# Altium PCB Arduino_DUE_V02b.PcbDoc (part 3 of 3)
Units mm, origin at the board's own origin, x right, y up, seen from the top; angles counter-clockwise.
Board outline 112.18 x 53.64 mm, 4 copper layers (Top Layer, Mid-Layer 1, Mid-Layer 2, Bottom Layer); 129 components, 175 nets, 644 pads, 366 vias.
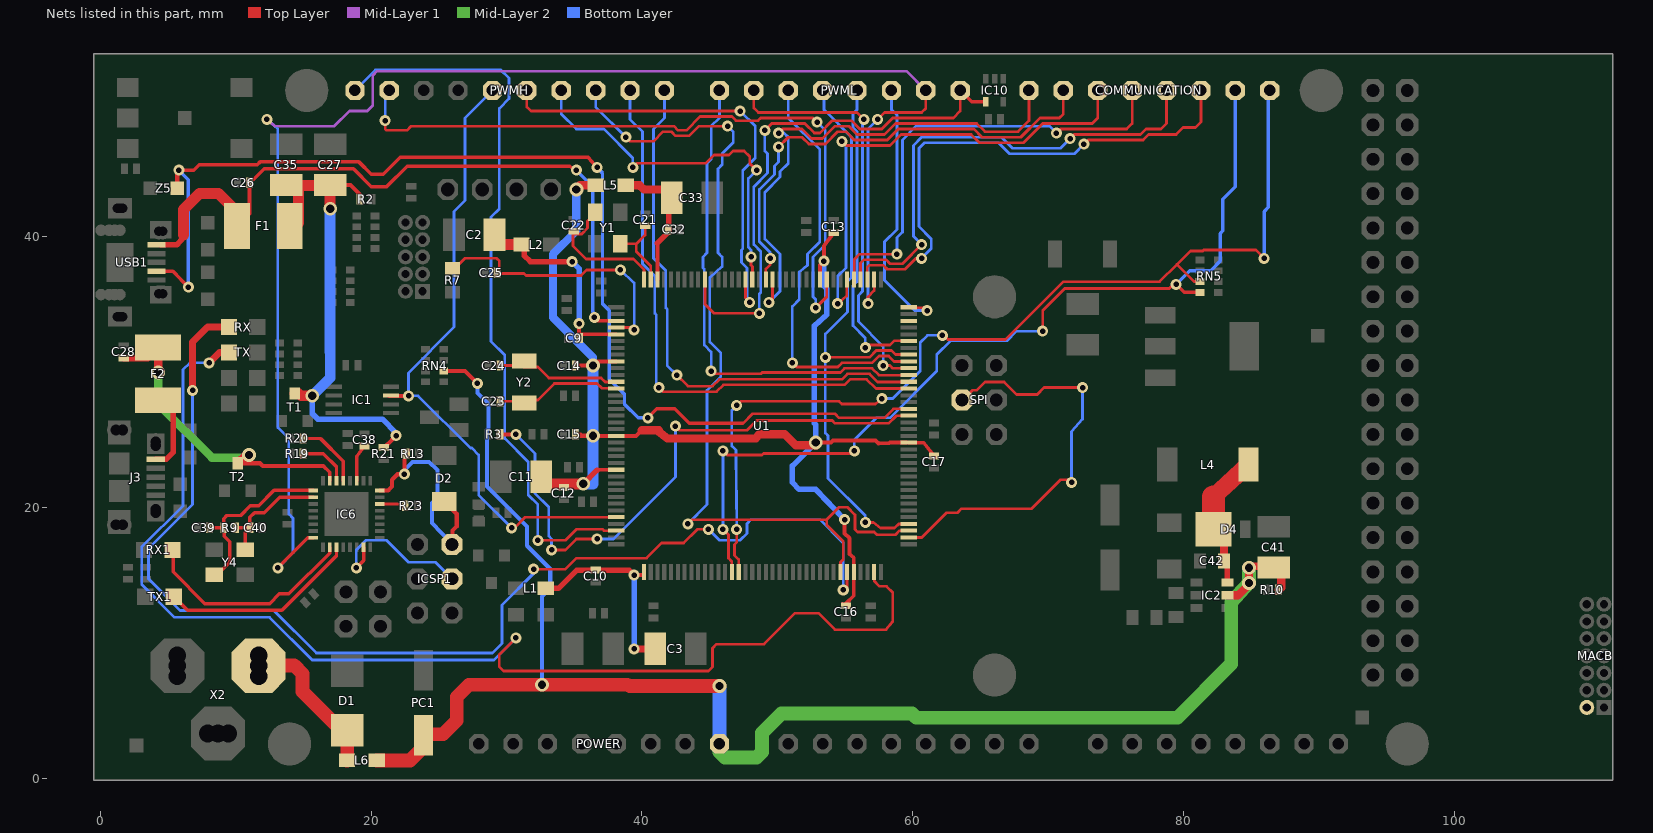
[diagram p5: the nets of this part, all layers, seen from the top]

## Via types
v1: diameter 0.813, hole 0.406, Top Layer to Bottom Layer, 313 vias
v2: diameter 1.016, hole 0.61, Top Layer to Bottom Layer, 52 vias
v3: diameter 0.914, hole 0.508, Top Layer to Bottom Layer, 1 vias

## Nets (pads, with @x,y where several pads share a name; then routed paths per layer and width w, separated by ;. In a path a pad name is that pad's centre, name@x,y a point inside that pad or via, vN(x,y) a via of type N, cw(c..) or ccw(c..) an arc to the next point about the centre after c; other vN are vias at no path point) (continued)
PWM2: PWML.3 U1.144 | length 20.5
  Top Layer w0.203: U1.144@59.695,34.785 59.538,34.747 60.858,34.747 v1(61.062,34.544)
  Bottom Layer w0.203: PWML.3@58.42,50.902 PWML.3@58.42,50.8 58.42,49.378 58.826,48.971 58.826,40.538 57.912,39.624 57.912,36.779 60.147,34.544 v1(61.062,34.544)
PWM3: PWML.4 U1.139 | length 23.2
  Top Layer w0.203: v1(56.49,31.801) 56.693,32.004 58.318,32.004 58.623,32.309 59.538,32.309 U1.139@59.695,32.285
  Bottom Layer w0.203: PWML.4@55.88,50.8 55.88,49.378 55.575,49.073 55.575,48.057 55.88,47.752 55.88,36.678 55.575,36.373 55.575,33.426 56.49,32.512 v1(56.49,31.801)
PWM5: PWML.6 U1.136 | length 31.2
  Top Layer w0.203: v1(51.105,30.683) 51.41,30.378 54.458,30.378 54.762,30.683 56.998,30.683 57.506,31.191 58.217,31.191 58.623,30.785 U1.136@59.695,30.785
  Bottom Layer w0.203: PWML.6@50.8,50.8 50.8,48.768 53.137,46.431 53.137,39.624 52.222,38.71 52.222,37.897 51.613,37.389 51.613,35.357 51.105,34.849 v1(51.105,30.683)
PWM6: PWML.7 U1.135 | length 30.9
  Top Layer w0.203: PWML.7@48.26,50.8 48.26,49.505 48.59,49.174 55.88,49.174 v1(56.388,48.666) ; v1(57.81,30.48) 58.318,30.48 58.522,30.277 59.538,30.277 U1.135@59.695,30.285
  Bottom Layer w0.203: v1(56.388,48.666) 56.286,48.565 56.286,35.966 55.982,35.662 55.982,33.731 57.81,31.902 v1(57.81,30.48)
PWM7: PWML.8 U1.134 | length 36.5
  Top Layer w0.203: v1(45.11,30.074) 45.314,29.87 48.768,29.87 48.87,29.972 54.661,29.972 54.966,30.277 56.998,30.277 57.506,29.769 59.639,29.769 59.655,29.785 U1.134@59.695,29.785
  Bottom Layer w0.203: v1(45.11,30.074) 45.11,31.496 44.602,32.004 44.602,37.592 44.501,37.694 44.501,38.506 44.806,38.811 44.806,45.415 45.11,45.72 45.11,48.158 45.72,48.768 PWML.8@45.72,50.8
PWM8: PWMH.1 U1.133 | length 40.2
  Top Layer w0.203: v1(42.57,29.769) 43.383,28.956 45.212,28.956 45.72,29.464 54.762,29.464 55.169,29.87 56.794,29.87 57.404,29.261 59.538,29.261 U1.133@59.695,29.285
  Bottom Layer w0.203: PWMH.1@41.656,50.8 41.656,48.768 40.843,47.955 40.843,38.405 41.758,37.49 41.758,34.747 41.859,34.646 41.859,30.48 v1(42.57,29.769)
PWM9: PWMH.2 U1.132 | length 42.1
  Top Layer w0.203: v1(41.25,28.854) 41.554,28.55 45.517,28.55 46.025,29.058 54.966,29.058 55.372,29.464 56.591,29.464 57.277,28.778 59.334,28.778 59.429,28.785 U1.132@59.695,28.785
  Bottom Layer w0.203: PWMH.2@39.116,50.8 39.116,48.666 40.03,47.752 40.03,37.998 40.945,37.084 40.945,34.341 41.046,34.239 41.046,29.058 v1(41.25,28.854)
PWM11: PWMH.4 U1.20 | length 28.1
  Top Layer w0.203: v1(39.319,45.11) 39.624,45.415 44.704,45.415 45.314,46.025 46.431,46.025 46.736,46.33 47.549,46.33 47.955,45.923 47.955,45.415 v1(48.463,44.907) ; v1(48.057,38.506) 48.057,37.897 48.158,37.795 48.158,36.982 U1.20@48.145,36.835
  Bottom Layer w0.203: PWMH.4@34.036,50.8 34.036,49.073 35.154,47.955 37.186,47.955 39.319,45.822 v1(39.319,45.11) ; v1(48.057,38.506) 48.057,39.014 47.854,39.218 47.854,44.298 v1(48.463,44.907)
PWM12: PWMH.5 U1.21 | length 34.2
  Top Layer w0.203: PWMH.5@31.496,50.8 31.496,49.581 31.801,49.276 v1(47.244,49.276) ; U1.21@47.645,36.835 47.645,35.464 v1(47.955,35.154)
  Bottom Layer w0.203: v1(47.244,49.276) 48.362,48.158 48.362,45.822 47.447,44.907 47.447,39.116 47.346,39.014 47.346,38.1 47.752,37.694 47.752,35.357 v1(47.955,35.154)
PWM13: IC1.3 PWMH.6 U1.68 | length 48.1
  Top Layer w0.203: IC1.3@21.336,28.245 IC1.3@21.468,28.264 ; v1(30.378,18.491) 30.582,18.491 31.375,19.285 U1.68@38.095,19.285
  Top Layer w0.305: IC1.3@21.336,28.245 v1(22.758,28.245)
  Bottom Layer w0.203: PWMH.6@28.956,50.8 26.924,48.768 26.924,42.672 26.111,41.859 26.111,33.325 22.758,29.921 v1(22.758,28.245) 23.47,28.245 27.33,24.384 27.432,24.384 27.94,23.876 27.94,20.93 v1(30.378,18.491)
RD+: IC6.29 R20.1 | length 5.1
  Top Layer w0.254: R20.1@14.973,25.095 16.256,25.095 17.936,23.415 IC6.29@17.936,21.957
RD-: IC6.30 R19.1 | length 4
  Top Layer w0.254: R19.1@14.973,23.978 14.976,24.018 15.037,23.978 16.459,23.978 17.436,23 IC6.30@17.436,21.957
RESET2: D2.A IC6.24 ICSP1.5 R13.1 | length 17.5
  Top Layer w0.305: IC6.24@20.636,21.257 21.257,21.257 21.539,21.539 21.539,22.047 21.946,22.454 v1(22.454,22.454) 22.454,23.937 R13.1@22.619,23.978 ; D2.A@25.4,20.449 26.314,19.534 26.314,18.593 26.01,18.288 26.01,17.272 ICSP1.5@25.959,17.272
  Bottom Layer w0.305: v1(22.454,22.454) 22.454,22.758 23.063,23.368 24.282,23.368 24.892,22.758 24.892,20.726 24.486,20.32 24.486,18.847 25.908,17.374 25.959,17.323 ICSP1.5@25.959,17.272
RESET_CMD: IC6.22 R23.1 | length 1.9
  Top Layer w0.254: IC6.22@20.636,20.257 21.968,20.257 R23.1@22.517,20.117
RESETA: MACB.2
RX: IC10.4 PWML.1 U1.27 | length 40.3
  Top Layer w0.203: U1.27@44.645,36.835 44.645,35.009 45.314,34.341 v1(48.666,34.341) ; v1(49.073,47.854) 49.581,48.362 52.019,48.362 52.73,47.65 53.137,47.65 54.051,48.565 55.474,48.565 56.083,47.955 57.709,47.955 58.522,48.768 62.992,48.768 63.5,49.276 PWML.1@63.5,50.8
  Top Layer w0.254: PWML.1@63.5,50.8 64.35,49.95 IC10.4@65.39,49.95
  Bottom Layer w0.203: v1(48.666,34.341) 48.666,35.763 48.768,35.865 48.768,38.913 48.26,39.421 48.26,43.688 49.276,44.704 49.276,46.126 49.073,46.33 v1(49.073,47.854)
RXD0: COMMUNICATION.2 U1.18 | length 36.1
  Top Layer w0.203: U1.18@49.145,36.835 49.149,37.617 49.479,37.948 v1(49.479,38.405) ; v1(50.089,46.634) 50.8,47.346 51.816,47.346 52.324,46.838 53.543,46.838 54.458,47.752 55.067,47.752 55.677,47.142 58.115,47.142 58.928,47.955 64.516,47.955 65.126,47.346 67.97,47.346 69.393,48.768 70.815,48.768 71.12,49.073 COMMUNICATION.2@71.12,50.8
  Bottom Layer w0.203: v1(49.479,38.405) 49.479,38.811 48.666,39.624 48.666,43.485 49.784,44.602 49.784,45.212 50.089,45.517 v1(50.089,46.634)
RXD1: COMMUNICATION.4 U1.5 | length 33.7
  Top Layer w0.203: U1.5@55.645,36.835 55.677,36.982 55.677,38.321 56.066,38.71 v1(58.826,38.71) ; v1(70.612,47.65) 70.917,47.955 75.794,47.955 76.2,48.362 COMMUNICATION.4@76.2,50.8
  Bottom Layer w0.203: v1(58.826,38.71) 58.826,39.929 59.233,40.335 59.233,47.142 60.249,48.158 70.104,48.158 v1(70.612,47.65)
RXD2: COMMUNICATION.6 U1.3 | length 38.9
  Top Layer w0.203: U1.3@56.645,36.835 56.645,37.747 56.794,37.897 57.81,37.897 58.115,37.592 59.436,37.592 60.249,38.405 v1(60.655,38.405) ; v1(72.644,46.838) 72.949,47.142 77.013,47.142 77.419,47.549 79.451,47.549 79.959,48.057 80.874,48.057 81.28,48.463 COMMUNICATION.6@81.28,50.8
  Bottom Layer w0.203: v1(60.655,38.405) 61.366,39.116 61.366,39.827 60.452,40.742 60.452,46.533 60.858,46.939 66.345,46.939 67.158,46.126 71.933,46.126 v1(72.644,46.838)
RXL: RX.C U1.103 | length 88.2
  Top Layer w0.203: v1(32.004,15.443) 34.341,15.443 35.154,16.256 40.335,16.256 41.453,17.374 43.078,17.374 44.094,18.39 v1(44.907,18.39) ; v1(54.864,13.919) 55.145,14.099 U1.103@55.145,15.235 U1.103@55.169,15.235
  Top Layer w0.508: v1(6.807,28.651) 6.807,32.207 7.925,33.325 RX.C@9.491,33.325
  Bottom Layer w0.203: v1(6.807,28.651) 6.807,20.218 3.556,16.967 3.556,14.732 5.893,12.395 12.802,12.395 15.951,9.246 28.956,9.246 29.667,9.957 29.667,12.802 32.004,15.138 v1(32.004,15.443) ; v1(44.907,18.39) 45.72,17.577 47.244,17.577 47.752,18.085 47.752,18.796 48.057,19.101 53.137,19.101 54.864,17.374 v1(54.864,13.919)
RXL-U2: IC6.10 RX1.C | length 16.1
  Top Layer w0.254: RX1.C@5.317,16.866 5.385,16.493 5.385,15.24 7.722,12.903 12.497,12.903 13.208,13.614 13.919,13.614 16.936,16.632 IC6.10@16.936,17.057
SCK2: IC6.15 ICSP1.3 | length 11.6
  Top Layer w0.254: v1(18.898,15.545) 19.436,16.084 IC6.15@19.436,17.057
  Bottom Layer w0.203: v1(18.898,15.545) 18.898,16.866 19.609,17.577 21.133,17.577 22.758,15.951 24.74,15.951 ICSP1.3@25.959,14.732
SCL0-3: COMMUNICATION.8 RN5.7 U1.87 | length 73.2
  Top Layer w0.203: v1(46.99,18.39) 46.99,17.424 46.838,17.272 46.838,16.459 47.142,16.154 47.142,15.24 U1.87@47.145,15.235 ; v1(46.99,27.534) 47.295,27.838 54.559,27.838 54.762,27.635 57.252,27.635 v1(57.709,28.042) ; v1(62.179,32.715) 62.281,32.715 62.586,32.41 66.853,32.41 71.12,36.678 78.232,36.678 79.502,37.948 ; RN5.7@81.215,36.684 80.766,36.684 79.502,37.948 ; v1(85.954,38.405) 85.344,39.014 81.483,39.014 81.418,38.949 80.504,38.949 79.502,37.948
  Bottom Layer w0.203: v1(46.99,18.39) 46.939,24.232 46.634,24.536 46.634,27.178 v1(46.99,27.534) ; v1(57.709,28.042) 58.522,28.042 60.554,30.074 60.554,32.182 61.087,32.715 v1(62.179,32.715)
  Bottom Layer w0.254: v1(85.954,38.405) 85.954,41.859 86.258,42.164 86.258,50.698 COMMUNICATION.8@86.36,50.8
SCL1: PWMH.10 U1.70 | length 54.6
  Top Layer w0.203: v1(32.309,17.577) 34.341,17.577 35.154,18.39 37.084,18.39 37.186,18.288 38.092,18.288 U1.70@38.095,18.285 U1.70@37.998,18.288
  Bottom Layer w0.203: PWMH.10@18.796,50.8 20.32,52.324 29.566,52.324 30.175,51.714 30.175,50.19 29.464,49.479 29.464,42.062 28.854,41.453 28.854,32.258 29.87,31.242 29.87,25.095 31.598,23.368 31.598,20.93 32.309,20.218 v1(32.309,17.577)
SDA0-3: COMMUNICATION.7 RN5.8 U1.86 | length 69.3
  Top Layer w0.203: v1(45.974,18.39) 46.38,17.983 46.38,16.256 46.629,16.007 U1.86@46.629,15.337 ; v1(45.974,24.181) 46.279,23.876 48.87,23.876 48.971,23.978 55.474,23.978 v1(55.677,24.181) ; U1.86@46.645,15.235 U1.86@46.629,15.337 ; U1.86@46.685,15.24 U1.86@46.629,15.337 ; v1(69.596,33.02) 69.596,34.544 71.222,36.17 78.943,36.17 79.248,36.474 v1(79.451,36.474)
  Top Layer w0.254: v1(79.451,36.474) 80.041,35.884 RN5.8@81.215,35.884
  Bottom Layer w0.203: v1(45.974,18.39) v1(45.974,24.181) ; v1(55.677,24.181) 55.677,24.994 57.302,26.619 58.318,26.619 61.773,30.074 61.773,31.293 62.789,32.309 66.954,32.309 67.666,33.02 v1(69.596,33.02)
  Bottom Layer w0.254: v1(79.451,36.474) 80.467,37.49 81.991,37.49 82.702,38.202 82.702,40.234 82.906,40.437 82.906,42.774 83.82,43.688 COMMUNICATION.7@83.82,50.8
SDA1: PWMH.9 U1.9 | length 52.8
  Top Layer w0.203: v1(21.031,48.565) 21.031,47.955 21.133,47.854 22.657,47.854 22.962,48.158 42.367,48.158 42.672,47.854 43.282,47.854 44.298,48.87 46.634,48.87 46.939,48.565 48.565,48.565 48.768,48.768 52.629,48.768 v1(52.934,48.463) ; v1(52.832,34.747) 53.645,35.56 53.645,36.779 U1.9@53.645,36.835
  Bottom Layer w0.203: v1(21.031,48.565) 21.031,50.597 21.133,50.698 PWMH.9@21.336,50.8 ; v1(52.832,34.747) 52.832,35.357 52.629,35.56 52.629,38.506 53.543,39.421 53.543,47.854 v1(52.934,48.463)
SPCK: SPI.3 U1.110 | length 31.2
  Top Layer w0.203: U1.110@59.695,17.785 60.66,17.785 62.484,19.609 63.297,19.609 63.602,19.914 68.783,19.914 70.917,22.047 71.526,22.047 v1(71.73,21.844) ; SPI.3@63.627,27.94 64.414,28.651 64.719,28.651 65.329,29.261 66.751,29.261 67.666,28.346 69.19,28.346 69.698,28.854 v1(72.542,28.854)
  Bottom Layer w0.203: v1(71.73,21.844) 71.73,25.603 72.542,26.518 v1(72.542,28.854)
SS0/PWM10: PWMH.3 U1.102 U1.111 | length 67.5
  Top Layer w0.203: v1(38.811,47.346) 39.116,47.041 40.843,47.041 41.554,47.752 42.164,47.752 42.469,47.447 43.485,47.447 44.196,48.158 v1(46.33,48.158) ; v1(43.383,18.796) 43.688,19.101 53.645,19.101 ; U1.102@54.645,15.235 54.661,15.24 54.661,15.951 54.864,16.154 54.864,17.475 53.645,18.694 53.645,19.101 ; U1.111@59.695,18.285 59.538,18.288 59.03,18.288 58.725,17.983 57.353,17.983 57.15,18.186 55.931,18.186 55.728,18.39 55.728,19.456 55.169,20.015 54.559,20.015 53.645,19.101
  Bottom Layer w0.203: PWMH.3@36.576,50.8 36.576,49.581 v1(38.811,47.346) ; v1(43.383,18.796) 44.806,20.218 44.806,28.651 45.822,29.667 45.822,31.394 45.009,32.207 45.009,36.982 45.923,37.795 45.923,38.506 45.618,38.811 45.618,45.009 45.923,45.314 45.923,46.126 46.736,46.939 46.736,47.752 v1(46.33,48.158)
SS1/PWM4: PWML.5 U1.112 U1.137 | length 44.8
  Top Layer w0.203: v1(53.543,31.09) 56.794,31.09 57.302,31.598 58.42,31.598 58.725,31.293 59.538,31.293 U1.137@59.695,31.285 ; v1(56.49,18.898) 57.099,18.898 57.607,18.491 58.649,18.491 58.964,18.785 U1.112@59.695,18.785
  Bottom Layer w0.203: PWML.5@53.34,50.8 53.442,50.8 53.442,49.378 55.474,47.346 55.474,36.982 55.169,36.678 55.169,34.442 53.543,32.817 v1(53.543,31.09) 53.543,25.502 53.746,25.298 53.746,22.149 56.49,19.406 v1(56.49,18.898)
SS3: U1.142
SW: C42.2 D4.P$1 IC2.6 L4.P$1 | length 10.4
  Top Layer w0.406: D4.P$1@82.206,18.39 D4.P$1@82.982,17.918 ; C42.2@82.982,16.053 83.243,15.893 IC2.6@83.243,14.463
  Top Layer w0.61: C42.2@82.982,16.053 D4.P$1@82.982,17.918
  Top Layer w1.27: 82.206,20.786 L4.P$1@84.788,23.165
  Top Layer w1.676: D4.P$1@82.206,18.39 82.206,20.786
TX: IC6.8 PWML.2 U1.2 | length 111.5
  Top Layer w0.203: v1(56.693,35.052) 56.688,35.108 56.688,35.555 57.15,36.017 U1.2@57.145,36.835 ; v1(57.404,48.666) 57.912,49.174 60.655,49.174 60.96,49.479 PWML.2@60.96,50.8
  Top Layer w0.254: v1(13.106,15.545) 15.319,17.757 IC6.8@15.736,17.757
  Mid-Layer 1 w0.203: v1(12.294,48.666) 12.903,48.158 17.272,48.158 18.39,49.276 19.71,49.276 20.117,49.682 20.117,51.918 20.422,52.222 59.538,52.222 PWML.2@60.96,50.8
  Bottom Layer w0.203: v1(12.294,48.666) 13.106,47.955 13.106,25.908 13.919,25.095 13.919,19.507 14.224,19.202 14.224,16.662 v1(13.106,15.545) ; v1(56.693,35.052) 56.693,47.955 v1(57.404,48.666)
TXD0: COMMUNICATION.1 U1.17 | length 39
  Top Layer w0.203: v1(49.378,35.154) 49.645,35.394 U1.17@49.645,36.835 ; v1(50.089,47.65) 50.394,47.955 51.816,47.955 52.527,47.244 53.34,47.244 54.254,48.158 55.27,48.158 55.88,47.549 57.912,47.549 58.725,48.362 64.719,48.362 65.329,47.752 67.767,47.752 68.58,48.565 COMMUNICATION.1@68.58,50.8
  Bottom Layer w0.203: v1(49.378,35.154) 50.19,35.966 50.19,38.71 49.073,39.827 49.073,43.282 50.19,44.399 50.19,44.806 50.8,45.415 50.8,47.346 50.495,47.65 v1(50.089,47.65)
TXD1: COMMUNICATION.3 U1.6 | length 36.9
  Top Layer w0.203: v1(54.458,35.052) 55.118,35.611 55.118,36.83 55.123,36.835 U1.6@55.145,36.835 ; v1(54.762,47.041) 55.067,46.736 58.318,46.736 59.131,47.549 64.313,47.549 64.922,46.939 68.174,46.939 69.596,48.362 73.254,48.362 73.66,48.768 COMMUNICATION.3@73.66,50.8
  Bottom Layer w0.203: v1(54.458,35.052) 54.458,37.084 55.067,37.694 55.067,46.736 v1(54.762,47.041)
TXD2: COMMUNICATION.5 U1.4 | length 36.6
  Top Layer w0.203: U1.4@56.145,36.835 56.145,38.06 56.388,38.303 58.014,38.303 58.318,37.998 59.233,37.998 v1(60.655,39.421) ; v1(71.628,47.244) 71.933,47.549 76.81,47.549 77.216,47.955 78.334,47.955 78.74,48.362 COMMUNICATION.5@78.74,50.8
  Bottom Layer w0.203: v1(60.655,39.421) 60.046,40.03 60.046,46.736 60.655,47.346 66.548,47.346 67.361,46.533 70.917,46.533 v1(71.628,47.244)
TXL: TX.C U1.107 | length 91.4
  Top Layer w0.203: v1(30.683,10.363) 29.464,9.144 29.464,8.23 29.769,7.925 44.907,7.925 45.212,8.23 45.212,9.601 45.517,9.906 49.022,9.906 51.308,12.192 53.035,12.192 54.254,10.973 58.014,10.973 58.522,11.582 58.522,13.716 58.064,14.173 57.556,14.173 57.145,14.585 U1.107@57.145,15.235
  Top Layer w0.508: v1(8.026,30.683) 8.788,31.445 TX.C@9.491,31.445
  Bottom Layer w0.203: v1(8.026,30.683) 6.604,30.683 6.096,30.175 6.096,20.117 3.048,17.069 3.048,14.326 5.486,11.887 12.497,11.887 15.646,8.738 29.058,8.738 v1(30.683,10.363)
TXL-U2: IC6.11 TX1.C | length 14.7
  Top Layer w0.254: TX1.C@5.419,13.411 6.435,12.395 13.411,12.395 17.436,16.42 IC6.11@17.436,17.057
UOTGID: U1.129 USB1.4 Z5.2 | length 87
  Top Layer w0.203: 47.447,26.213 48.158,26.924 54.254,26.924 54.559,26.619 57.912,26.619 58.578,27.285 U1.129@59.695,27.285
  Top Layer w0.254: USB1.4@4.064,37.44 USB1.4@4.369,37.44 ; USB1.4@4.148,37.45 4.394,37.45 ccw(c4.394,37.414) USB1.4@4.369,37.44 ; v1(5.791,44.907) 6.909,44.907 7.315,45.314 11.582,45.314 11.786,45.517 19.101,45.517 20.015,44.602 20.879,44.602 22.149,45.872 36.017,45.872 v1(36.678,45.11) ; v1(6.502,36.271) 5.359,37.44 USB1.4@4.369,37.44 ; v1(40.437,26.619) 41.097,27.28 42.418,27.28 43.485,26.213 47.447,26.213
  Top Layer w0.305: Z5.2@5.674,43.586 5.674,44.79 v1(5.791,44.907)
  Bottom Layer w0.254: v1(5.791,44.907) 6.502,44.196 v1(6.502,36.271) ; v1(36.678,45.11) 37.084,44.704 37.084,35.052 37.592,34.544 37.592,29.464 38.71,28.346 38.71,27.635 39.726,26.619 v1(40.437,26.619)
UOTGVBOF: R3.1 U1.128 | length 43.9
  Top Layer w0.203: v1(33.325,16.866) 34.341,16.866 35.154,17.678 v1(36.678,17.678) ; v1(42.469,26.01) 42.774,25.705 47.752,25.705 48.463,26.416 54.051,26.416 54.254,26.213 58.217,26.213 58.776,26.772 59.487,26.772 U1.128@59.695,26.785
  Top Layer w0.305: R3.1@29.502,25.4 v1(30.683,25.4)
  Bottom Layer w0.203: v1(30.683,25.4) 32.106,23.978 32.106,21.031 33.122,20.015 33.122,17.882 33.325,17.678 v1(33.325,16.866) ; v1(36.678,17.678) 37.897,17.678 42.469,22.25 v1(42.469,26.01)
USBVCC: C27.+ C35.+ F1.1 R2.2 R21.2 T1.1 | length 36.8
  Top Layer w0.305: C27.+@16.967,43.813 18.467,43.813 19.164,43.117 R2.2@19.164,42.774 ; R21.2@20.93,24.422 21.173,24.628 v1(21.844,25.298)
  Top Layer w0.406: C35.+@13.705,43.803 C35.+@13.716,43.813
  Top Layer w0.762: T1.1@14.351,28.423 14.376,28.448 14.63,28.448 14.834,28.245 v2(15.646,28.245)
  Top Layer w0.813: C35.+@13.716,43.813 14.042,43.803 14.427,43.79 C35.+@14.63,43.79 ; F1.1@13.99,40.792 14.63,40.996 C35.+@14.63,43.79 ; C27.+@16.866,43.712 C27.+@16.967,43.813 C27.+@16.967,43.79 ; v2(16.967,42.062) C27.+@16.967,43.79 ; C35.+@14.63,43.79 C27.+@16.967,43.79
  Bottom Layer w0.406: v2(15.646,28.245) 15.646,26.924 16.053,26.518 20.828,26.518 21.844,25.502 v1(21.844,25.298)
  Bottom Layer w0.762: v2(15.646,28.245) 16.967,29.566 16.967,31.496
  Bottom Layer w0.813: 16.967,31.496 v2(16.967,42.062)
USBVCCU2: C28.1 F2.1 IC6.31 T2.1 | length 24.3
  Top Layer w0.254: 16.459,23.063 16.936,22.586 IC6.31@16.936,21.957
  Top Layer w0.305: T2.1@10.135,23.266 11.786,23.266 11.989,23.063 16.459,23.063
  Top Layer w0.508: C28.1@1.727,31.052 3.498,31.052 F2.1@4.267,31.82
  Top Layer w0.61: v2(4.267,29.972) F2.1@4.267,31.82 ; T2.1@10.135,23.266 10.744,23.876 v2(10.973,23.876)
  Mid-Layer 2 w0.61: v2(4.267,29.972) 4.267,27.635 8.23,23.673 10.77,23.673 v2(10.973,23.876)
VBG: C25.1 R7.2 U1.40 | length 20.4
  Top Layer w0.203: R7.2@26.01,37.668 26.187,37.668 26.924,38.405 29.261,38.405 29.464,38.202 29.464,37.378 C25.1@29.299,37.338 29.555,37.287 31.293,37.287 31.445,37.135 35.509,37.135 35.916,37.541 v1(38.405,37.541) ; U1.40@38.095,33.285 38.227,33.299 39.243,33.299 v1(39.421,33.122)
  Bottom Layer w0.203: v1(38.405,37.541) 39.421,36.576 v1(39.421,33.122)
VDDANA: C3.+ C10.2 L1.2 U1.73 | length 15.2
  Top Layer w0.203: U1.73@40.12,15.011 U1.73@40.145,15.235
  Top Layer w0.305: v1(39.421,15.011) U1.73@40.12,15.011
  Top Layer w0.406: L1.2@32.901,14.021 33.833,14.021 35.192,15.38 C10.2@36.576,15.38 39.053,15.38 v1(39.421,15.011)
  Top Layer w0.508: v1(39.421,9.55) C3.+@40.969,9.55
  Bottom Layer w0.406: v1(39.421,9.55) v1(39.421,15.011)
VDDOUT: C11.+ C12.2 C13.2 C14.2 C15.2 C16.2 C17.2 L5.1 U1.10 U1.45 U1.56 U1.61 U1.104 U1.124 | length 99.4
  Top Layer w0.203: C11.+@32.512,22.352 32.564,22.3 C11.+@32.564,22.276 ; C11.+@32.715,21.539 C11.+@32.918,21.742 ; C15.2@35.09,25.4 35.357,25.4 ; C14.2@35.09,30.48 35.357,30.48 ; L5.1@36.373,43.79 L5.1@36.594,43.79 ; U1.61@37.998,22.784 U1.61@38.095,22.785 U1.61@38.202,22.758 ; C16.2@54.801,12.903 C16.2@55.067,12.738 ; U1.124@59.538,24.79 U1.124@59.695,24.785 ; C17.2@61.57,23.774 C17.2@61.57,23.813
  Top Layer w0.254: C12.2@34.239,21.476 34.686,21.681 34.747,21.742 ; U1.124@59.695,24.785 60.803,24.785 C17.2@61.57,23.813
  Top Layer w0.279: C15.2@35.09,25.4 35.458,25.4 35.458,25.298 ; v2@36.677,30.785 U1.45@38.095,30.785 ; 36.678,22.758 36.601,22.784 U1.61@37.998,22.784 ; U1.10@53.145,36.835 53.145,37.905 v1(53.442,38.202) ; C16.2@55.067,12.738 55.067,12.903 55.645,13.481 U1.104@55.645,15.235 55.645,16.288 55.321,16.561 ; 57.455,24.74 58.268,24.74 58.318,24.79 U1.124@59.538,24.79
  Top Layer w0.292: v2@36.488,25.285 U1.56@38.095,25.285 39.56,25.285
  Top Layer w0.305: 35.357,30.48 v2(36.373,30.48) v2@36.677,30.785 ; 35.458,25.298 v2(36.373,25.298) v2@36.488,25.285 ; 39.56,25.285 39.98,25.705 ; v2(52.832,24.79) 53.95,24.79 54.102,24.943 57.252,24.943 57.455,24.74 ; v1(53.442,38.202) 53.442,39.319 C13.2@54.153,40.297 ; v1(54.966,19.101) 54.966,18.085 55.321,17.729 55.321,16.561
  Top Layer w0.406: v2(35.662,21.742) 36.678,22.758
  Top Layer w0.61: v2(35.154,43.485) 35.408,43.79 36.373,43.79 L5.1@36.373,43.84 ; 39.98,25.705 41.25,25.705 41.25,25.603 41.859,25.095 48.412,25.095 48.666,25.4 50.546,25.4 51.359,24.587 52.883,24.587 v2(52.832,24.79)
  Top Layer w0.813: C11.+@32.512,22.352 32.512,21.742 32.918,21.742 34.747,21.742 v2(35.662,21.742)
  Bottom Layer w0.406: v1(53.442,38.202) 53.442,36.373 53.645,36.17 53.645,34.239 52.73,33.426 52.73,26.213 52.832,26.111 v2(52.832,24.79) 51.105,23.063 51.105,21.844 51.613,21.336 52.832,21.336 v1(54.966,19.101)
  Bottom Layer w0.61: v2(35.154,43.485) 35.154,40.437 33.426,38.71 33.426,34.036 36.373,31.09 v2(36.373,30.48)
  Bottom Layer w0.813: v2(35.662,21.742) 36.373,21.742 v2(36.373,25.298) v2(36.373,30.48)
VDDOUTMI: C2.+ C9.2 L2.2 U1.41 | length 16.4
  Top Layer w0.203: C2.+@29.11,40.132 29.11,39.775 29.058,39.827 29.058,39.421 C2.+@29.185,39.497 ; L2.2@31.107,39.421 L2.2@31.293,39.421
  Top Layer w0.254: C9.2@35.389,32.785 35.357,32.785 35.357,32.715 C9.2@35.395,32.512
  Top Layer w0.279: C9.2@35.389,32.785 U1.41@38.095,32.785
  Top Layer w0.305: v1(35.357,33.579) 35.357,32.817 C9.2@35.389,32.785
  Top Layer w0.406: L2.2@31.293,39.421 31.293,38.608 31.75,38.151 v1(34.849,38.151)
  Top Layer w0.813: C2.+@29.058,39.421 L2.2@31.107,39.421
  Bottom Layer w0.406: v1(34.849,38.151) 35.357,37.643 v1(35.357,33.579)
VDDPLL: C32.2 C33.+ L5.2 U1.34 | length 11.8
  Top Layer w0.203: L5.2@38.608,43.79 L5.2@38.794,43.79 ; C33.+@41.961,42.672 C33.+@42.266,43.078 ; C33.+@42.188,42.875 C33.+@42.266,43.078 ; C33.+@42.266,43.688 42.266,43.282 C33.+@42.266,43.078
  Top Layer w0.279: U1.34@41.145,36.835 41.145,39.519
  Top Layer w0.406: 41.145,39.519 C32.2@41.961,40.335 ; C32.2@41.923,40.538 C32.2@41.961,40.335 ; C33.+@41.961,42.672 C32.2@41.961,40.335
  Top Layer w0.61: L5.2@38.608,43.79 39.827,43.79 40.132,43.485 42.062,43.485 C33.+@42.266,43.282
VIN: C41.+ IC2.5 L6.1 PC1.+ POWER.8 R10.1 RN4.6 | length 118.3
  Top Layer w0.305: RN4.6@25.364,30.08 26.924,30.074 v1(27.838,29.159)
  Top Layer w0.406: v2(84.836,15.545) v2@84.961,15.67
  Top Layer w0.61: IC2.5@83.243,13.513 84.023,13.513 84.836,14.326 v2(84.836,14.427) v2(84.836,15.545) ; v2@84.961,15.67 C41.+@86.665,15.569 87.213,15.02 87.213,14.061 87.071,13.919 R10.1@87.008,13.919
  Top Layer w1.016: L6.1@20.404,1.321 22.86,1.321 23.851,2.311 PC1.+@23.851,3.188 23.914,3.251 25.298,3.251 26.314,4.267 26.314,5.994 27.229,6.909 v2(32.614,6.909) 38.913,6.909 39.116,6.807 v2(45.72,6.807)
  Mid-Layer 2 w1.016: POWER.8@45.72,2.54 45.72,1.93 46.126,1.524 48.463,1.524 48.87,1.93 48.87,3.353 50.292,4.775 59.944,4.775 60.249,4.47 79.553,4.47 83.515,8.433 83.515,13.005 v2(84.836,14.427) v2(84.836,15.545)
  Bottom Layer w0.305: v1(27.838,29.159) 27.838,28.448 28.651,27.635 28.651,25.806 28.55,25.705 28.55,21.539 31.496,18.593 31.496,17.17 33.223,15.443 33.223,14.021 32.614,13.411 v2(32.614,6.909)
  Bottom Layer w1.016: POWER.8@45.72,2.54 v2(45.72,6.807)
VIN+: D1.C L6.2 X2.2 | length 11.5
  Top Layer w1.016: X2.2@11.684,8.306 11.709,8.331 14.326,8.331 14.935,7.722 14.935,6.401 17.287,4.048 D1.C@18.237,3.54 18.237,1.354 L6.2@18.204,1.321
VUCAP: C38.1 IC6.27 | length 2.8
  Top Layer w0.254: IC6.27@18.936,21.957 18.936,23.773 C38.1@19.507,24.549
XIN: C22.1 U1.36 Y1.1 | length 11.2
  Top Layer w0.203: C22.1@34.95,40.399 C22.1@34.912,40.196 ; Y1.1@36.271,41.351 Y1.1@36.474,41.758 ; U1.36@40.145,36.835 40.145,37.579 39.37,38.354 35.865,38.354 34.912,39.307 C22.1@34.912,40.196 ; C22.1@34.912,40.196 35.555,40.196 35.966,40.64 35.966,41.148 Y1.1@36.54,41.79 ; Y1.1@36.474,41.758 36.576,41.859 Y1.1@36.54,41.79 ; Y1.1@36.474,41.758 Y1.1@36.54,41.79
XIN32: C24.1 U1.48 Y2.P$2 | length 9.9
  Top Layer w0.203: C24.1@29.502,30.48 Y2.P$2@31.014,30.48 ; U1.48@38.095,29.285 37.998,29.261 37.287,29.261 36.982,29.566 33.122,29.566 32.309,30.378 Y2.P$2@31.243,30.378 ; Y2.P$2@31.014,30.48 Y2.P$2@31.293,30.811 Y2.P$2@31.243,30.378 ; Y2.P$2@31.014,30.48 Y2.P$2@31.243,30.378
XOUT: C21.1 U1.35 Y1.3 | length 6.3
  Top Layer w0.203: Y1.3@38.405,39.421 Y1.3@38.39,39.49 38.405,39.624 38.405,39.472 39.573,39.472 ; C21.1@40.234,40.805 40.234,40.843 40.234,40.129 39.576,39.472 39.573,39.472 ; U1.35@40.645,36.835 40.64,36.982 40.64,37.849 39.982,38.506 39.98,38.506 39.573,38.913 39.573,39.472
XOUT32: C23.1 U1.49 Y2.P$1 | length 9.9
  Top Layer w0.203: C23.1@29.502,27.838 Y2.P$1@31.217,27.838 ; U1.49@38.095,28.785 37.998,28.785 37.998,28.804 37.033,28.804 36.678,29.159 33.528,29.159 32.309,27.94 Y2.P$1@31.699,27.94 ; Y2.P$1@31.217,27.838 Y2.P$1@31.293,27.711 Y2.P$1@31.699,27.94 ; Y2.P$1@31.217,27.838 Y2.P$1@31.699,27.94
XT1: C39.1 IC6.1 R9.1 Y4.1 | length 13.5
  Top Layer w0.254: C39.1@8.065,18.491 R9.1@9.106,18.491 ; Y4.1@8.4,15.026 8.625,15.026 9.55,15.951 9.55,17.475 9.144,17.882 9.144,18.453 R9.1@9.106,18.491 ; IC6.1@15.736,21.257 12.824,21.257 11.684,20.117 11.074,20.117 10.363,19.406 9.347,19.406 9.106,19.164 R9.1@9.106,18.491
XT2: C40.1 IC6.2 R9.2 Y4.3 | length 9
  Top Layer w0.254: R9.2@10.058,18.555 R9.2@9.995,18.491 C40.1@11.036,18.491 ; Y4.3@10.701,16.876 10.701,18.155 C40.1@11.036,18.491 ; IC6.2@15.736,20.757 13.239,20.757 12.09,19.609 11.379,19.609 11.036,19.266 C40.1@11.036,18.491
XUSB: C26.1 F1.2 U1.39 USB1.1 | length 52.9
  Top Layer w0.254: USB1.1@4.148,39.4 4.42,39.4 ccw(c4.451,39.458) USB1.1@4.47,39.395 ; C26.1@11.011,43.993 11.074,43.993 12.09,45.009 18.694,45.009 20.015,43.688 21.133,43.688 22.657,45.212 34.646,45.212 35.052,44.907 v1(35.154,44.907) ; v1(36.474,34.036) 36.725,33.785 U1.39@38.095,33.785
  Top Layer w0.305: F1.2@10.09,40.792 11.011,41.714 C26.1@11.011,43.993
  Top Layer w0.406: USB1.1@4.445,39.395 4.47,39.395 5.639,39.395 6.147,39.929 6.147,40.132
  Top Layer w0.813: 6.147,40.132 6.147,42.012 7.315,43.18 8.738,43.18 10.058,41.859 10.058,40.824 F1.2@10.09,40.792
  Bottom Layer w0.254: v1(35.154,44.907) 36.373,43.688 36.373,34.442 36.474,34.341 v1(36.474,34.036)
XVCC: F2.2 J3.P1 | length 6.5
  Top Layer w0.406: J3.P1@4.089,23.546 4.851,23.546 5.385,24.079 5.385,27.92 F2.2@4.267,27.92
pads on no net: FID1.P$1 FID2.P$1 FID3.P$1 FID4.P$1 IC6.5 IC6.6 IC6.7 IC6.12 IC6.14 IC6.25 JTAG.7 MACB.4 MACB.6 RESET.5 RN5.3 RN5.4 RN5.5 RN5.6 U1.50 U1.69 U1.93 U1.117 U1.131 U1.138 U1.141 U1.143 USB1. X2.4 X2.5 X2.6 X2.7 X2.8 X2.9

## Keep-outs
Keep-Out Layer:
  lines w0.254: 0,1 ccw(c1,1) 1,0 98.06,0 ccw(c98.06,1) 99.06,1 99.06,2.54 101.6,5.08 101.6,37.846 99.06,40.386 99.06,51.816 97.536,53.34 1,53.34 ccw(c1,52.34) 0,52.34 0,1

## Other copper
Top Layer:
  text "5V" at 13.106,25.197 h1.27
Mid-Layer 1:
  text "This is actually a plane layer..." at 21.387,-4.801 h1.52
Mid-Layer 2:
  text "This is actually a plane layer..." at 21.387,-4.801 h1.52

## Silkscreen, mask and mechanical layers (free items; w line width, h text height)
Top Overlay:
  circle w0.305: c21.336,25.959 r0.18
  lines w0.203: 24.079,42.723 24.943,41.859 25.705,41.859 25.705,42.062 24.994,42.062 24.282,42.774 24.282,43.586 24.079,43.586 24.079,42.723
  lines w0.254: 0,1 0,0 1,0
  lines w0.305: 29.337,45.974 30.226,45.085 40.64,45.085 ; 46.228,45.085 57.404,45.085 58.42,46.101 ; 50.216,6.706 50.927,7.417 53.975,7.417 ; 61.087,42.164 62.23,41.021 63.5,41.021 ; 71.323,7.417 81.813,7.417 82.398,6.833 ; 83.439,41.021 85.217,41.021 86.36,42.164 ; 88.773,22.987 88.773,11.303 89.789,10.287 ; 88.773,33.528 88.773,47.244 89.789,48.26 ; 93.98,5.715 93.98,5.207 96.52,5.207 96.52,5.715 ; 93.98,52.07 93.98,52.705 96.52,52.705 96.52,52.07
  lines w0.406: 60.325,45.72 60.96,46.355 ; 60.325,45.72 60.96,45.72 ; 60.325,45.72 60.96,46.99 61.595,45.72 ; 60.96,45.72 61.595,45.72 ; 60.96,45.72 60.96,46.355 ; 60.96,46.355 61.595,45.72 ; 62.865,46.99 63.5,46.355 ; 62.865,46.99 63.5,45.72 64.135,46.99 ; 62.865,46.99 63.5,46.99 ; 63.5,46.355 63.5,46.99 ; 63.5,46.355 64.135,46.99 ; 63.5,46.99 64.135,46.99
  text "M.Banzi" at -0.508,53.34 h1.14 r180
  text "5V" at 93.472,52.959 h1.12 r180
  text "D.Cuartielles" at -0.508,51.308 h1.14 r180
  text "T.Igoe" at -0.508,49.276 h1.14 r180
  text "9" at 40.005,47.625 h1.42 r90
  text "8" at 42.545,47.625 h1.42 r90
  text "7" at 46.355,47.625 h1.42 r90
  text "6" at 48.895,47.625 h1.42 r90
  text "5" at 51.435,47.625 h1.42 r90
  text "4" at 53.975,47.625 h1.42 r90
  text "3" at 56.515,47.625 h1.42 r90
  text "2" at 59.055,47.625 h1.42 r90
  text "1" at 61.595,47.625 h1.42 r90
  text "0" at 64.135,47.625 h1.42 r90
  text "22" at 90.17,47.625 h1.42
  text "G.Martino" at -0.508,47.244 h1.14 r180
  text "14" at 69.215,46.736 h1.42 r90
  text "15" at 71.755,46.736 h1.42 r90
  text "16" at 74.295,46.736 h1.42 r90
  text "17" at 76.835,46.736 h1.42 r90
  text "18" at 79.375,46.736 h1.42 r90
  text "19" at 81.915,46.736 h1.42 r90
  text "20" at 84.455,46.736 h1.42 r90
  text "21" at 86.995,46.736 h1.42 r90
  text "13" at 29.845,46.355 h1.42 r90
  text "12" at 32.385,46.355 h1.42 r90
  text "11" at 34.925,46.355 h1.42 r90
  text "10" at 37.465,46.355 h1.42 r90
  text "GND" at 27.413,45.478 h1.42 r90
  text "D.Mellis" at -0.508,45.212 h1.14 r180
  text "24" at 90.17,45.085 h1.42
  text "SCL1" at 19.858,44.284 h1.42 r90
  text "SDA1" at 22.195,44.284 h1.42 r90
  text "AREF" at 24.735,44.284 h1.42 r90
  text "PWM" at 41.275,44.247 h1.68
  text "26" at 90.17,42.545 h1.42
  text "TX" at 61.595,42.418 h1.42 r90
  text "RX" at 64.135,42.418 h1.42 r90
  text "TX0" at 69.215,42.418 h1.42 r90
  text "RX0" at 71.755,42.418 h1.42 r90
  text "TX1" at 74.295,42.418 h1.42 r90
  text "RX1" at 76.835,42.418 h1.42 r90
  text "TX2" at 79.375,42.418 h1.42 r90
  text "RX3" at 81.915,42.418 h1.42 r90
  text "SDA" at 84.455,42.418 h1.42 r90
  text "SCL" at 86.995,42.418 h1.42 r90
  text "28" at 90.17,40.005 h1.42
  text "30" at 90.17,37.465 h1.42
  text "31" at 98.425,37.465 h1.42
  text "32" at 90.17,34.925 h1.42
  text "33" at 98.425,34.925 h1.42
  text "34" at 90.17,32.385 h1.42
  text "35" at 98.425,32.385 h1.42
  text "1" at 62.476,31.23 h1.27 r180
  text "36" at 90.17,29.845 h1.42
  text "37" at 98.425,29.845 h1.42
  text "38" at 90.17,27.305 h1.42
  text "39" at 98.425,27.305 h1.42
  text "MADE IN" at 103.632,26.06 h1.52
  text "40" at 90.17,24.765 h1.42
  text "41" at 98.425,24.765 h1.42
  text "ITALY" at 105.334,24.232 h1.52
  text "DIGITAL" at 89.535,23.495 h1.68 r90
  text "42" at 90.17,22.225 h1.42
  text "43" at 97.79,22.225 h1.42
  text "44" at 90.17,19.685 h1.42
  text "45" at 97.79,19.685 h1.42
  text "46" at 90.17,17.145 h1.42
  text "47" at 98.425,17.145 h1.42
  text "48" at 90.17,14.605 h1.42
  text "49" at 98.425,14.605 h1.42
  text "Arduino" at 59.893,12.294 h2.03
  text "50" at 90.17,12.065 h1.42
  text "51" at 98.425,12.065 h1.42
  text "52" at 90.17,9.525 h1.42
  text "53" at 98.425,9.525 h1.42
  text "DUE" at 63.043,9.5 h2.29
  text "www.arduino.cc" at 70.79,8.865 h1.65
  text "ANALOG   IN" at 54.635,6.452 h1.68
  text "GND" at 97.536,5.08 h1.42
  text "0" at 51.562,4.699 h1.42 r90
  text "1" at 53.848,4.699 h1.42 r90
  text "2" at 56.642,4.699 h1.42 r90
  text "3" at 59.182,4.699 h1.42 r90
  text "4" at 61.722,4.699 h1.42 r90
  text "5" at 64.135,4.699 h1.42 r90
  text "6" at 66.675,4.699 h1.42 r90
  text "7" at 69.342,4.699 h1.42 r90
  text "8" at 74.422,4.699 h1.42 r90
  text "9" at 76.962,4.699 h1.42 r90
  text "10" at 79.502,4.699 h1.42 r90
  text "11" at 81.839,4.699 h1.42 r90
  text "5V" at 37.071,4.272 h1.42
  text "GND" at 40.119,4.272 h1.42
  text "VIN" at 44.488,4.272 h1.42
  text "IOREF" at 31.212,4.254 h1.42 r90
  text "RESET" at 33.752,4.254 h1.42 r90
  text "3V3" at 36.292,4.254 h1.42 r90
  text "DAC0" at 84.277,4.089 h1.02 r90
  text "DAC1" at 86.817,4.089 h1.02 r90
  text "CANRX" at 89.357,4.089 h1.02 r90
  text "CANTX" at 91.77,4.089 h1.02 r90
Mechanical 2:
  text "USBVCCU2" at 3.556,21.133 h1.02
  text "PC2" at 73.355,17.374 h1.02
  text "PC1" at 22.606,5.131 h1.02

## Text inside footprints (layer, text, board x,y; h text height)
IC4: Top Overlay "2" at 77.054,33.193 h0.81 r270; Top Overlay "1" at 77.064,35.355 h0.81 r270; Top Overlay "4" at 83.922,29.997 h0.81 r270; Top Overlay "3" at 77.064,30.882 h0.81 r270
IC6: Top Overlay "1" at 15.086,21.507 h0.81
J3: Top Layer "DELETE SOLDER PADS" at -2.413,14.605 h0.81 r90; Top Overlay "PCB" at 0.127,17.399 h1.02 r270
USB1: Top Layer "DELETE SOLDER PADS" at -2.362,31.75 h0.81 r90; Top Overlay "PCB" at -0.152,32.55 h1.02 r270